# Altium PCB MIPCB.PcbDoc
Units mil, origin at the board's own origin, x right, y up, seen from the top; angles counter-clockwise.
Board outline 1750 x 2250 mil, 2 copper layers (Top Layer, Bottom Layer); 33 components, 24 nets, 83 pads, 7 vias.
Unrouted connection lines stored in the file: 6.
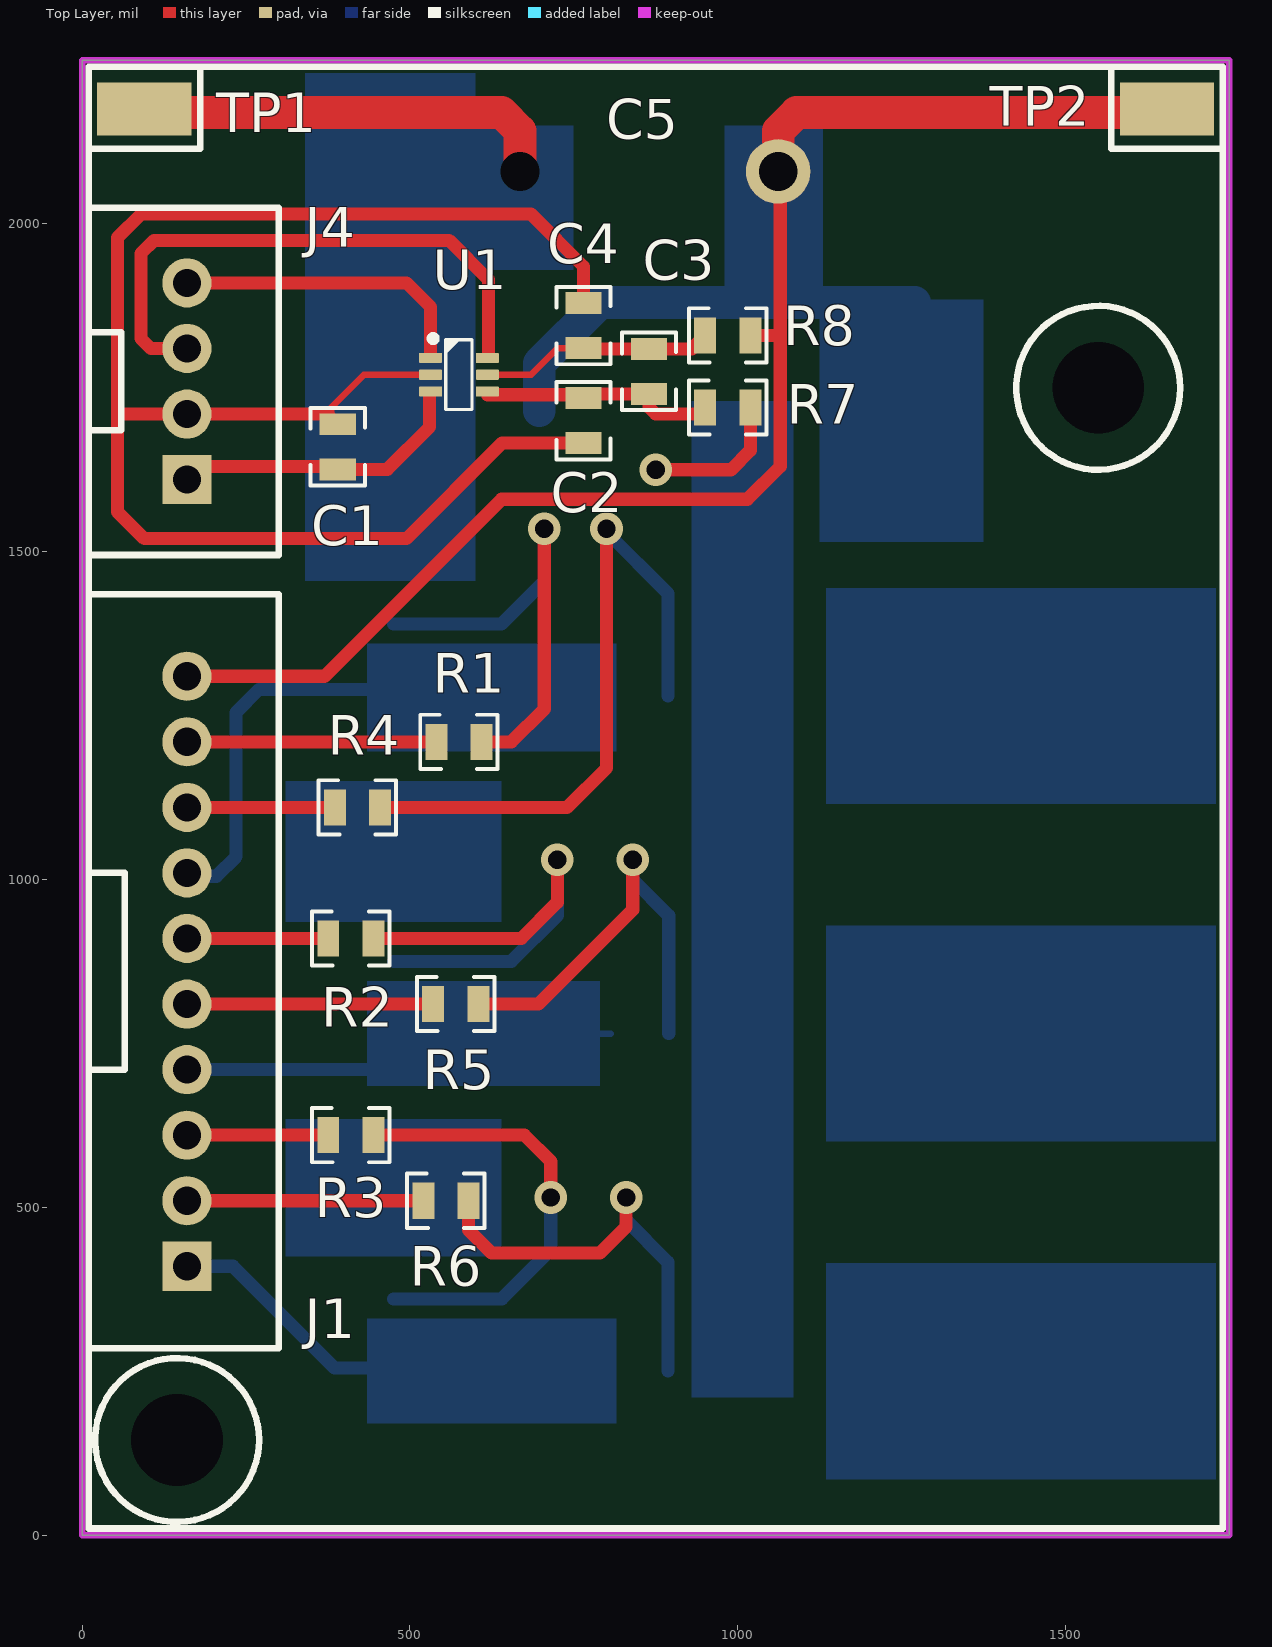
[diagram p0: Top Layer view]
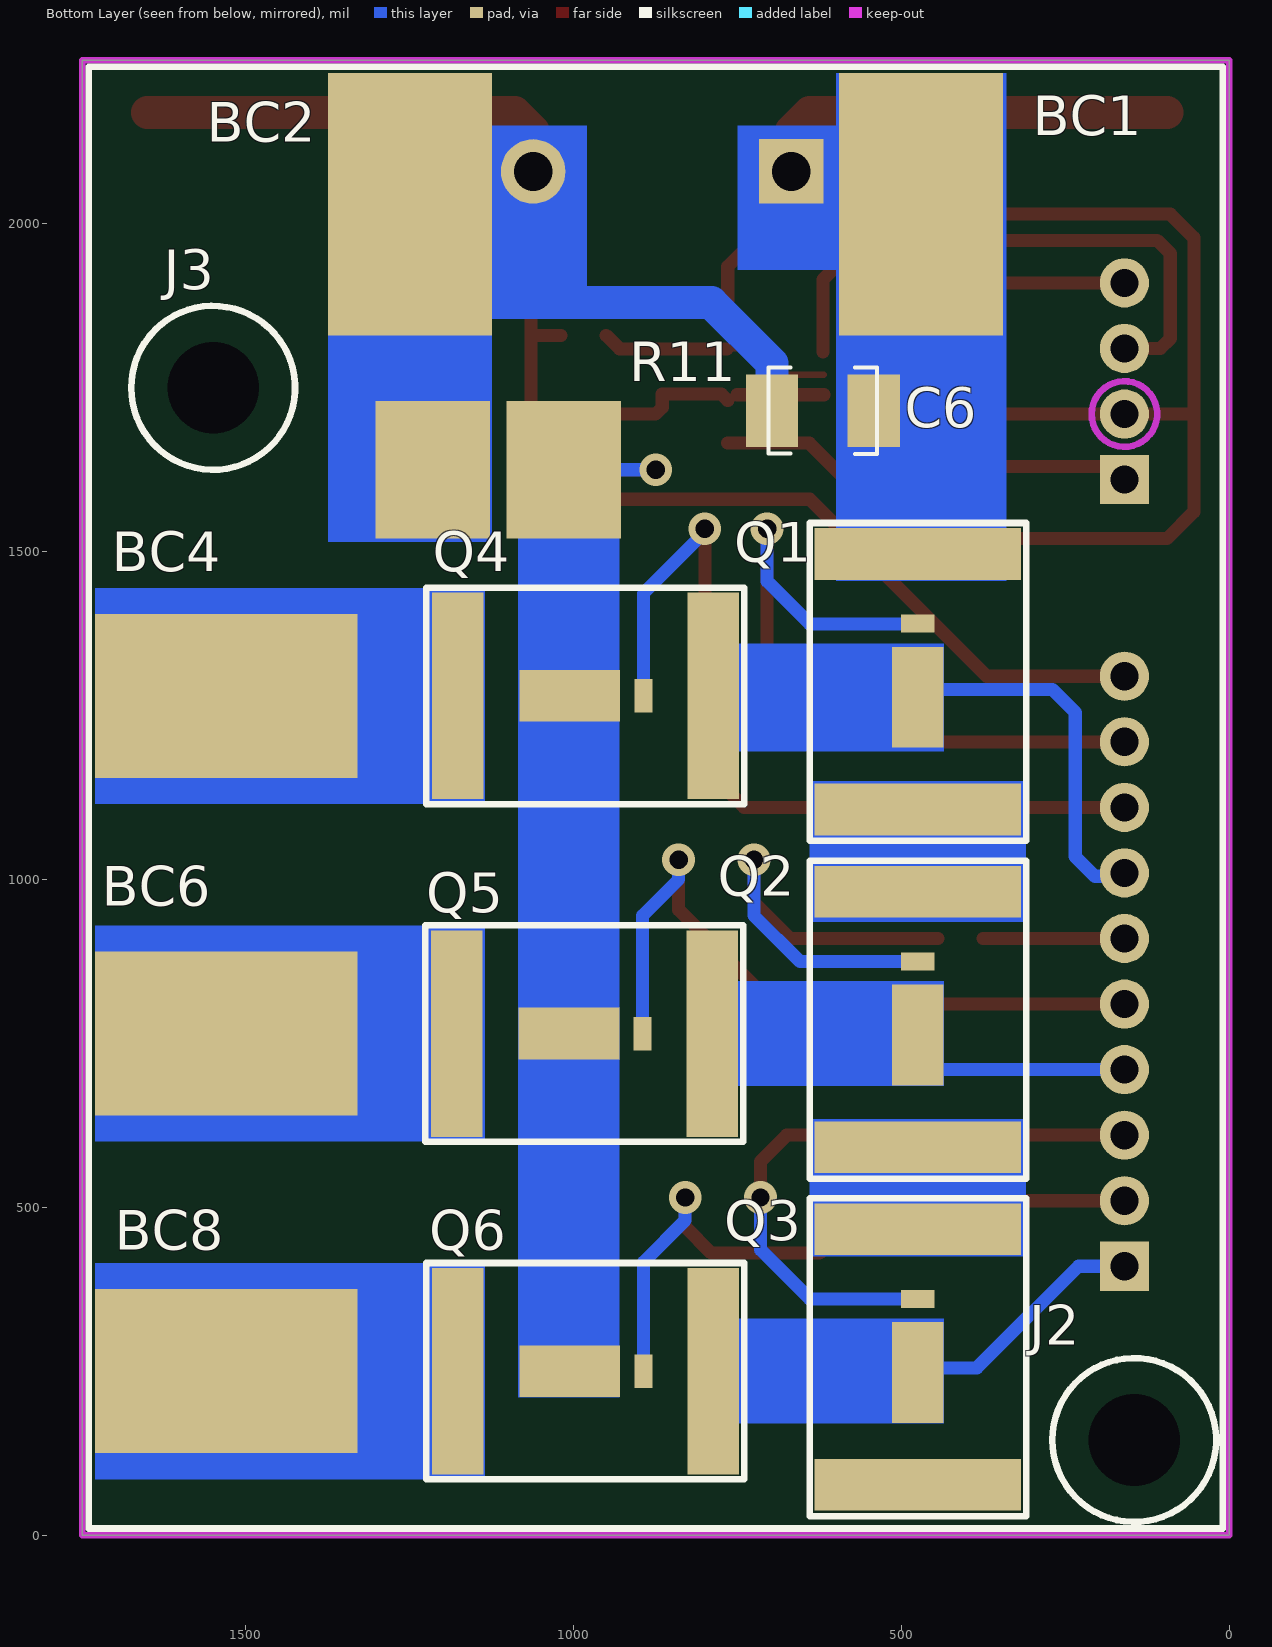
[diagram p1: Bottom Layer view, seen from below]
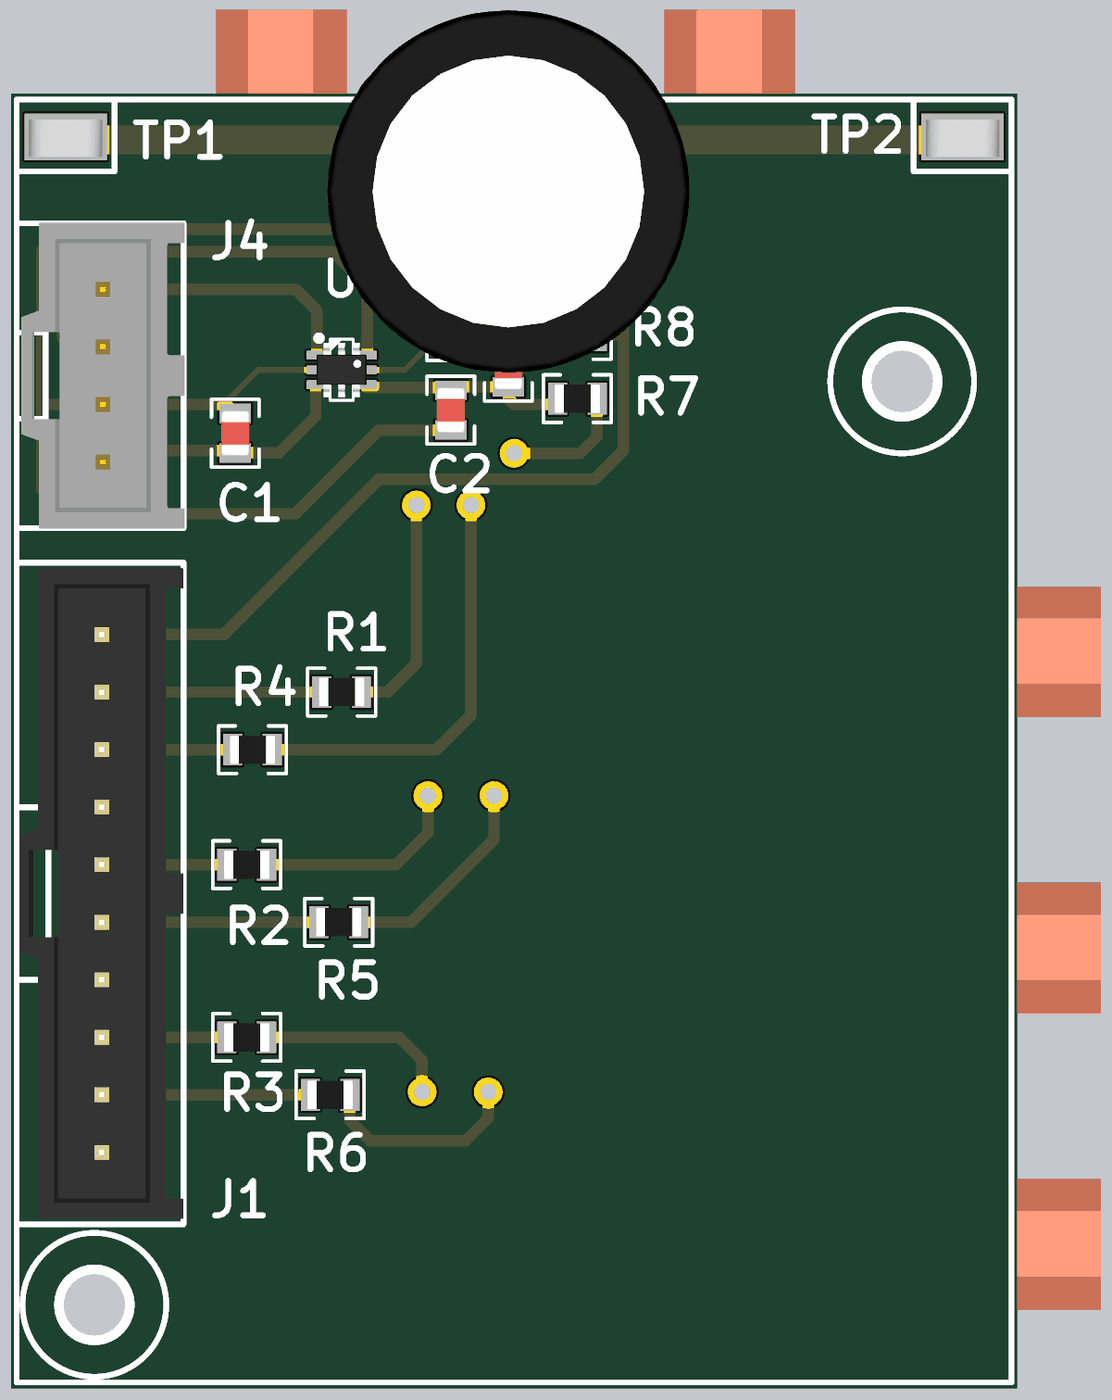
[diagram p2: 3D render of the assembled board from above, using the file's embedded part models]
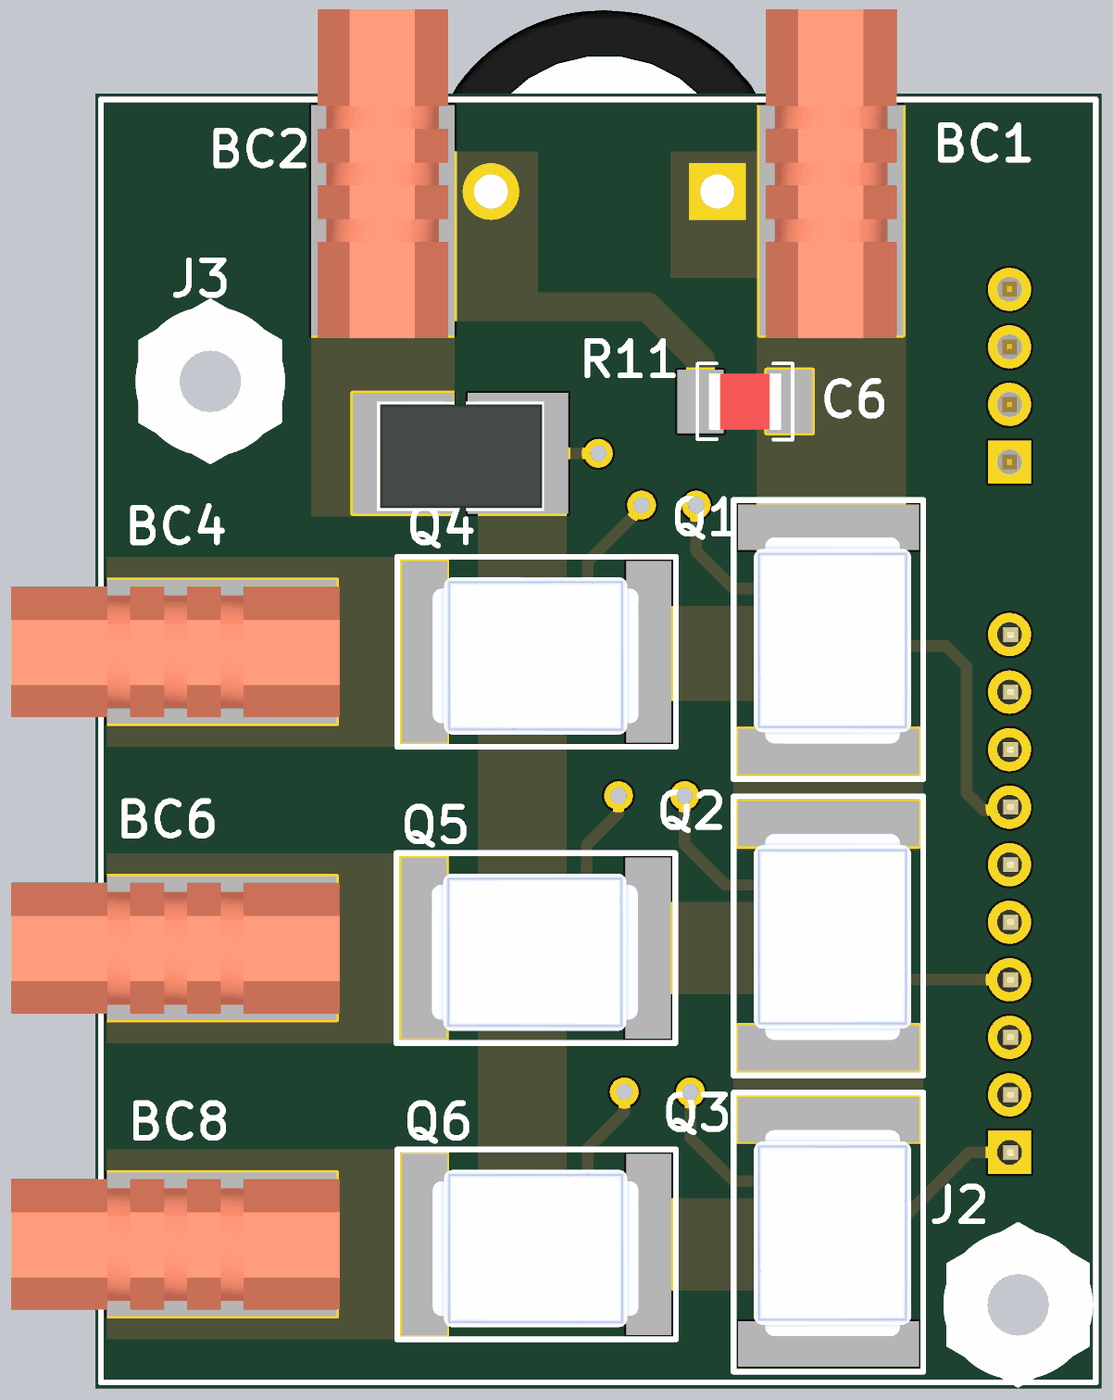
[diagram p3: 3D render of the assembled board from below, using the file's embedded part models]

## Layer stack, top to bottom
Top Solder: solder mask 0.4, Solder Resist, Dk 3.5
Top Layer: signal copper 1.4
Dielectric 1: dielectric 12.6, FR-4, Dk 4.8
Bottom Layer: signal copper 1.4
Bottom Solder: solder mask 0.4, Solder Resist, Dk 3.5

## Board outline
0,0 1750,0 1750,2250 0,2250

## Design rules (kind name [scope] priority, off if disabled: settings)
Clearance 10 [All vs InNetClass('All Nets')] p1: gap=6 except(10: Arc-Poly Arc-Region Track-Poly Track-Region SMDPad-Poly SMDPad-Region Fill-Poly Fill-Region Poly-Poly Poly-Region Region-Region)
Height [All] p1: minheight=0 maxheight=1968.5 prefheight=500
HoleSize [All] p1: absolutevalues=TRUE maxlimit=150 minlimit=13 maxpercent=80.000 minpercent=20.000
PlaneClearance [All] p1: clearance=30
PlaneConnect [All] p1: planeconnectstyle=Direct reliefexpansion=20 reliefentries=4 reliefconductorwidth=10 reliefairgap=10
PolygonConnect [All] p1: connectstyle=Direct reliefconductorwidth=20 reliefentries=4 polygonreliefangle="90 Angle" airgapwidth=10
RoutingVias [All] p1: holewidth=28 width=50 viastyle="Through Hole" minholewidth=13 minwidth=50 maxholewidth=28 maxwidth=50
SolderMaskExpansion [All] p1: expansion=4
Width [All] p1: maxlimit=50 minlimit=6 preferedwidth=20 bottomlayer_prefwidth=10 minimp=50.000000 maximp=50.000000 favimp=50.000000
26 further rules are at their usual default settings.

## Components (designator, comment, footprint, x,y, rotation, side; value= is the part's Value field where it differs from the comment)
BC1 "Bullet Connector Top" BULLET_CONNECTOR_TOP 470,1950 r0 bottom
BC2 "Bullet Connector Top" BULLET_CONNECTOR_TOP 1250,1950 r0 bottom
BC4 "Bullet Connector Top" BULLET_CONNECTOR_TOP 1450,1280 r270 bottom
BC6 "Bullet Connector Top" BULLET_CONNECTOR_TOP 1450,765 r270 bottom
BC8 "Bullet Connector Top" BULLET_CONNECTOR_TOP 1450,250 r270 bottom
C1 "0.22 uF" CAP-0805(2012)-R 390,1660 r90 top
C2 "0.22 uF" CAP-0805(2012)-R 765,1700 r270 top
C3 "0.22 uF" CAP-0805(2012)-R 865,1775 r90 top
C4 "0.22 uF" CAP-0805(2012)-R 765,1845 r90 top
C5 "Value" 2200UF_RAD_18X25MM 865,2080 r0 top
C6 "10 µF" CAP-1210(3225)-R 620,1715 r0 bottom
J1 "Header 10 pin" HEADER-10-100MIL 160,410 r90 top
J2 "Stand-off" "6-32 THREADED STANDOFF" 145,145 r180 bottom
J3 "Stand-off" "6-32 THREADED STANDOFF" 1550,1750 r180 bottom
J4 "Header 4 pin" HEADER-4-100MIL 160,1610 r90 top
Q1 "IRF6718" DIRECTFET-7 475,1478.82 r270 bottom
Q2 "IRF6718" DIRECTFET-7 475,963.58 r270 bottom
Q3 "IRF6718" DIRECTFET-7 475,448.82 r270 bottom
Q4 "IRF6718" DIRECTFET-7 805,1280 r0 bottom
Q5 "IRF6718" DIRECTFET-7 806.42,765 r0 bottom
Q6 "IRF6718" DIRECTFET-7 805,250 r0 bottom
R1 "10 Ohms" R-0805(2012)-R 575,1210 r180 top
R2 "10 Ohms" R-0805(2012)-R 410,910 r180 top
R3 "10 Ohms" R-0805(2012)-R 410,610 r180 top
R4 "10 Ohms" R-0805(2012)-R 420,1110 r180 top
R5 "10 Ohms" R-0805(2012)-R 570,810 r180 top
R6 "10 Ohms" R-0805(2012)-R 555,510 r180 top
R7 "75 Ohms" R-0805(2012)-R 985,1720 r180 top
R8 "75 Ohms" R-0805(2012)-R 985,1830 r180 top
R11 "0.002" WSHM28182L000FEB 1015,1625 r90 bottom
TP1 "S1751-46R" S1751-46R 95,2175 r0 top
TP2 "S1751-46R" S1751-46R 1655,2175 r0 top
U1 "INA213A" SOT-6 575,1770 r0 top

## Footprints (in the part's own frame and the unit in brackets; to place one, negate y for a bottom-side part, rotate by r counter-clockwise, add the part's x,y. Pads: shape width x height; smd on the part's side, far side on the other; paste and mask are expansions set on the pad)
"6-32 THREADED STANDOFF" [mil] "Keystone Threaded Standoff 534-2210"
  round 0 hole 140 unplated: 0(0,0)
  silkscreen extent -125,-125 125,125, body extent -125,-144 125,144, height 500
2200UF_RAD_18X25MM [mm] "10mm Pitch Radial Capacitor"
  round 0 / inner rect 0x0 / far side rect 2.5x2.5 hole 1.5 paste+0 mask+0: 1(-5,0)
  round 2.5 hole 1.5 paste+0.5 mask+0: 2(5,0)
  body extent -8,-8 8,8, height 35
BULLET_CONNECTOR_TOP [mil] "TOP_SIDE_BULLET"
  rect 250x400 smd: 1(0,-80)
  body extent -143,-446 143,125, height 246
CAP-0805(2012)-R [mm] "Capacitor 0805(2012) Reflow"
  rect 0.85x1.4 smd: 1(-0.875,0) 2(0.875,0)
  silkscreen extent -1.5,-1.05 1.5,1.05, body extent -1,-0.63 1,0.63, height 0.78
CAP-1210(3225)-R [mil] "Capacitor 1210(3225) Reflow"
  rect 80x110 smd: 1(-77.5,0) 2(77.5,0)
  silkscreen extent -83,-66 83,66, body extent -63,-49 63,49, height 36
DIRECTFET-7 [mm]
  rect 0.7x1.3 smd: 1(2.25,0)
  rect 2x8 smd: 2(-0.45,0) 2(9.45,0)
  rect 3.9x2 smd: 3(5.1,0)
  silkscreen extent -1.65,-4.19 10.67,4.19, body extent 0,-3.29 9.1,3.66, height 0.65
HEADER-4-100MIL [mil] "100 mil spacing"
  rect 75x75 hole 43: 1(0,0)
  round 75 hole 43: 2(100,0) 3(200,0) 4(300,0)
  silkscreen extent -115,-140 415,150, body extent -116,-142 416,142, height 431
HEADER-10-100MIL [mil] "100 Mil Pitch"
  rect 75x75 hole 43: 1(0,0)
  round 75 hole 43: 2(100,0) 3(200,0) 4(300,0) 5(400,0) 6(500,0) 7(600,0) 8(700,0) 9(800,0) 10(900,0)
  silkscreen extent -125,-140 1025,150, body extent -116,-140 1016,144, height 421
R-0805(2012)-R [mm] "Resistor 0805(2012) Reflow"
  rect 0.85x1.4 smd: 1(-0.875,0) 2(0.875,0)
  silkscreen extent -1.5,-1.05 1.5,1.05, body extent -1,-0.62 1,0.63, height 0.5
S1751-46R [mm] "PC TEST POINT TIN SMD"
  rect 3.65x2.05 smd: 1(0,0)
  silkscreen extent -2.16,-1.52 2.16,1.65, body extent -1.62,-0.89 1.62,0.76, height 2.05
SOT-6 [mm] "TI OP AMP SC70 PACKAGE"
  rrect25% 0.9x0.4 smd: 1(-1.1,0.65) 2(-1.1,0) 3(-1.1,-0.65) 4(1.1,-0.65) 5(1.1,0) 6(1.1,0.65)
  silkscreen extent -1.13,-1.35 0.51,1.53, body extent -1.2,-1.1 1.2,1.1, height 1.1
WSHM28182L000FEB [mil]
  rect 210x175 smd: 1(0,200) 2(0,0)
  body extent -100,-45 90,245, height 59

## Part data
BC1 BC2 BC4 BC6 BC8: "SMD BULLET CONNECTOR"
C1 C2 C3 C4: library part "CAP- 0.22 uF- 16 V-CER-0805(1202)", "CAP CER 0.22 UF 16V 10% X7R 0805(2012)"
C5: library part CAP_2200uF_50V_THT, "Capacitor THT Alum Elec 2200uF 20% 50V"
C6: library part "CAP- 10 uF- 50 V-CER-1210(3225)", "CAP CER 10 UF 50V 10% X5R 1210"
J1: library part CON-10Pin-100Mil, "Header, 10pin, .1 pitch"
J4: library part CON-4Pin-100Mil, "Header, 4 pin, .1 pitch"
Q1 Q2 Q3 Q4 Q5 Q6: "IRF6718L2TRPBF"
R1 R2 R3 R4 R5 R6: library part R-10-125mW-0805, "RES 10 OHM 1/8W 0805 SMD"
R7 R8: library part "R-75-62.5 mW-0805(2012)", "RES 75OHM 125 mW 0805(2012) SMD"
R11: library part WSHM28182, "RES  0.002 OHM  7W 2818(7146)-SMD"
TP1 TP2: "PC TEST POINT TIN SMD"
U1: library part OP-AMP-CURRENT-SENSE, "IC, OP AMP, CMOS"

## Via types
v1: diameter 50, hole 28, Top Layer to Bottom Layer, 7 vias

## Nets (pads, with @x,y where several pads share a name; then routed paths per layer and width w, separated by ;. In a path a pad name is that pad's centre, name@x,y a point inside that pad or via, vN(x,y) a via of type N, cw(c..) or ccw(c..) an arc to the next point about the centre after c; other vN are vias at no path point)
BATTERY_GND: BC2.1 C5.2 C6.2 J1.10 R8.1 R11.1 TP2.1 | length 2828.1
  Top Layer w20: J1.10 370,1310 640,1580 1015,1580 1065,1630 1065,1830 ; R8.1 1065,1830 ; C5.2@1065,2076.85 1065,1830
  Top Layer w50: C5.2@1061.85,2126.85 1061.85,2141.85 1090,2170 TP2.1@1650,2170
  Bottom Layer w50: C6.2 697.5,1787.5 790,1880 BC2.1@1270,1880
BATTERY_VCC: BC1.1 C5.1 C6.1 Q1.2 Q2.2 Q3.2 TP1.1 | length 1420.7
  Top Layer w50: TP1.1@95,2170 640,2170 668.15,2141.85 C5.1
  Bottom Layer w10: 423.66,1575.35 479.65,1575.35 480,1575 ; Q3.2@475,448.82 Q2.2@475,609.25 ; Q2.2@475,963.58 Q1.2@475,1124.49 ; Q1.2@480,1483.82 480,1575 ; BC1.1@480,1880 480,1575
BC_P1: BC4.1 J1.7 Q1.3 Q4.2 | length 1086.7
  Bottom Layer w10: Q1.3@475,1280 Q1.3@475,1285 ; Q4.2@1159.33,1280 BC4.1@1365,1280
  Bottom Layer w20: J1.7@165,1005 205,1005 235,1035 235,1255 270,1290 450,1290 Q1.3@460,1300 ; Q1.3@475,1280 Q4.2@805,1280
BC_P2: BC6.1 J1.4 Q2.3 Q5.2 | length 923.6
  Bottom Layer w10: Q2.3@445,710 475,740 Q2.3@475,764.76 ; Q2.3@449.76,790 Q2.3@475,764.76 ; Q5.2@806.42,765 475.24,765 Q2.3@475,764.76 ; Q5.2@1160.75,765 BC6.1@1365,765
  Bottom Layer w20: J1.4 Q2.3@445,710
BC_P3: BC8.1 J1.1 Q3.3 Q6.2 | length 911.9
  Bottom Layer w10: Q3.3@470,255 475,250 Q6.2@805,250 ; Q6.2@1159.33,250 BC8.1@1360,250
  Bottom Layer w20: J1.1 230,410 385,255 Q3.3@470,255
HS_P1: J1.9 R1.2 | length 380.6
  Top Layer w20: J1.9 R1.2
HS_P2: J1.6 R2.2 | length 215.6
  Top Layer w20: J1.6 R2.2
HS_P3: J1.3 R3.2 | length 215.6
  Top Layer w20: J1.3 R3.2
LS_P1: J1.8 R4.2 | length 225.6
  Top Layer w20: J1.8 R4.2
LS_P2: J1.5 R5.2 | length 375.6
  Top Layer w20: J1.5 R5.2
LS_P3: J1.2 R6.2 | length 360.6
  Top Layer w20: J1.2 R6.2
NetC2_1: C2.1 C3.1 R7.2 U1.4 | length 352.2
  Top Layer w10: C2.1@765,1730.59 C2.1@765.59,1730
  Top Layer w20: U1.4@618.31,1739.41 C2.1@751.18,1739.41 ; C2.1@765,1730.59 774.96,1740.55 C3.1 865,1720 875,1710 940.55,1710 R7.2
NetC3_2: C3.2 C4.1 R8.2 U1.5 | length 356.5
  Top Layer w10: U1.5 685,1770 725.55,1810.55 C4.1
  Top Layer w20: C4.1@766.1,1809.45 C3.2 930,1809.45 R8.2
NetQ1_1: Q1.1 R1.1 | length 728.2
  Top Layer w20: R1.1 655,1210 705,1260 v1(705,1535)
  Bottom Layer w20: Q1.1@475,1390 640,1390 705,1455 v1(705,1535)
NetQ2_1: Q2.1 R2.1 | length 732.3
  Top Layer w20: R2.1 670,910 725,965 v1(725,1030)
  Bottom Layer w20: Q2.1 655,875 725,945 v1(725,1030)
NetQ3_1: Q3.1 R3.1 | length 693.1
  Top Layer w20: R3.1 675,610 715,570 v1(715,515)
  Bottom Layer w20: Q3.1 640.24,360.24 715,435 v1(715,515)
NetQ4_1: Q4.1 R4.1 | length 1029.2
  Top Layer w20: R4.1 740,1110 800,1170 v1(800,1535)
  Bottom Layer w20: v1(800,1535) 800,1530 893.58,1436.42 Q4.1
NetQ4_3: Q4.3 Q5.3 Q6.3 R7.1 R11.2 | length 1395
  Top Layer w20: v1(875,1625) 990,1625 1019.45,1654.45 R7.1
  Bottom Layer w10: Q6.3@1003.82,250 1005.24,251.42 1005.24,765 1003.82,766.42 1003.82,1280 Q4.3@1005,1281.18
  Bottom Layer w20: v1(875,1625) R11.2
NetQ5_1: Q5.1 R5.1 | length 659
  Top Layer w20: R5.1 696.1,810 840,953.9 v1(840,1030)
  Bottom Layer w20: v1(840,1030) 840,1000 895,945 Q5.1
NetQ6_1: Q6.1 R6.1 | length 652.6
  Top Layer w20: R6.1 589.45,465.55 625,430 790,430 830,470 v1(830,515)
  Bottom Layer w20: v1(830,515) 830,480 893.58,416.42 Q6.1
OP_AMP_GND: C1.2 C2.2 C4.2 J4.2 U1.2 | length 2543
  Top Layer w10: C1.2@380,1695 380,1720 430,1770 U1.2@515,1770
  Top Layer w20: 55,1710 J4.2 374.45,1710 C1.2 ; C2.2 640.55,1665.55 495,1520 95,1520 54,1561 54,1979 90,2015 685,2015 765,1935 C4.2
OP_AMP_REF: J4.4 U1.1 | length 455.2
  Top Layer w20: J4.4 495,1910 531.69,1873.31 531.69,1805
OP_AMP_VCC: C1.1 J4.1 U1.3 | length 426.1
  Top Layer w20: J4.1@150,1630 C1.1@364.45,1630 ; C1.1 465.55,1625.55 530,1690 530,1735
SHUNT_VOLTAGE: J4.3 U1.6 | length 879.4
  Top Layer w20: J4.3 105,1810 90,1825 90,1955 110,1975 560,1975 620,1915 620,1805
pads on no net: J2.0 J3.0

## Keep-outs
Bottom Layer:
  circle w10: c160,1710 r50
Keep-Out Layer:
  the board outline again, w10

## Other copper
Bottom Layer:
  rectangle net BATTERY_GND: 1125,1515 1375,1885
  rectangle net NetQ4_3: 930,210 1085,1730
  rectangle net BC_P1: 435,1195 815,1360
  rectangle net BC_P2: 435,685 790,845
  rectangle net BATTERY_VCC: 340,1455 600,2230
  rectangle net BATTERY_VCC: 310,935 640,1150
  rectangle net BATTERY_VCC: 310,425 640,635
  rectangle net BC_P3: 435,170 815,330
  rectangle net BATTERY_GND: 980,1905 1130,2150
  rectangle net BATTERY_VCC: 540,1930 750,2150
  rectangle net BC_P3: 1135,85 1730,415
  rectangle net BC_P2: 1135,600 1730,930
  rectangle net BC_P1: 1135,1115 1730,1445
  pour cut-out: 339,1976 339,1995 601,1995 601,1976

## Silkscreen, mask and mechanical layers (free items; w line width, h text height)
Top Overlay:
  lines w10: 10,10 10,2240 1740,2240 1740,10 10,10
Bottom Overlay:
  lines w10: 10,10 1740,10 1740,2240 10,2240 10,10
Mechanical 15:
  the board outline again, w10